# Altium PCB Piscina-V.02.PcbDoc
Units mil, origin at the board's own origin, x right, y up, seen from the top; angles counter-clockwise.
Board outline 18954 x 11289 mil, 2 copper layers (Top Layer, Bottom Layer); 161 components, 101 nets, 445 pads, 0 vias.
Unrouted connection lines stored in the file: 319.
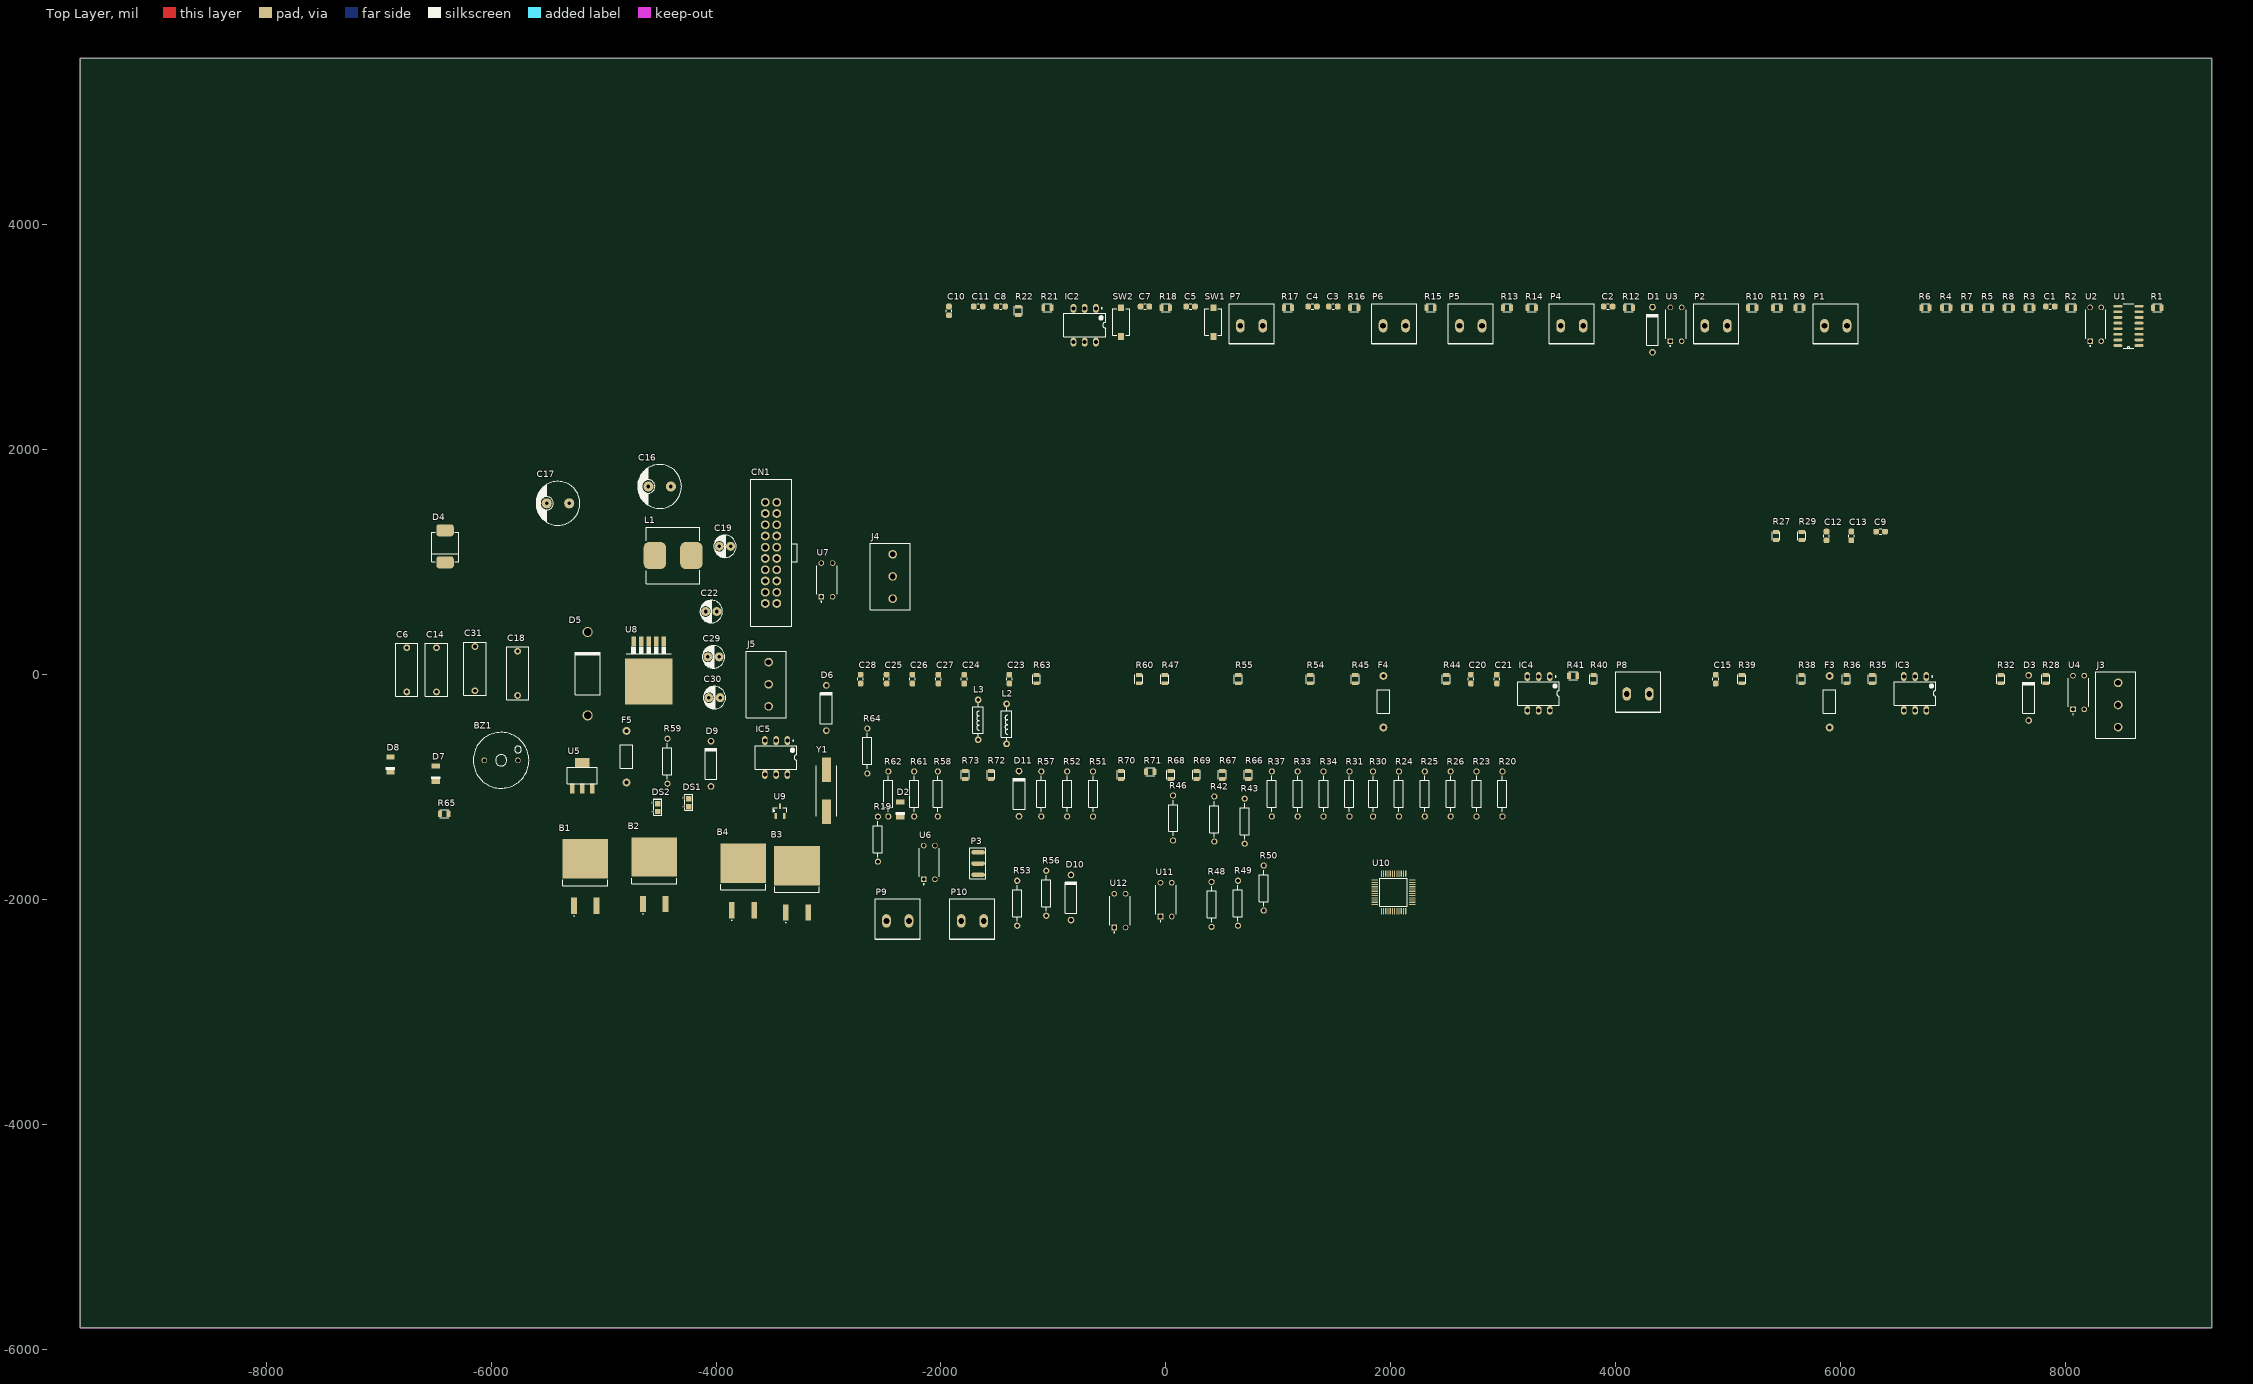
[diagram p0: Top Layer view]
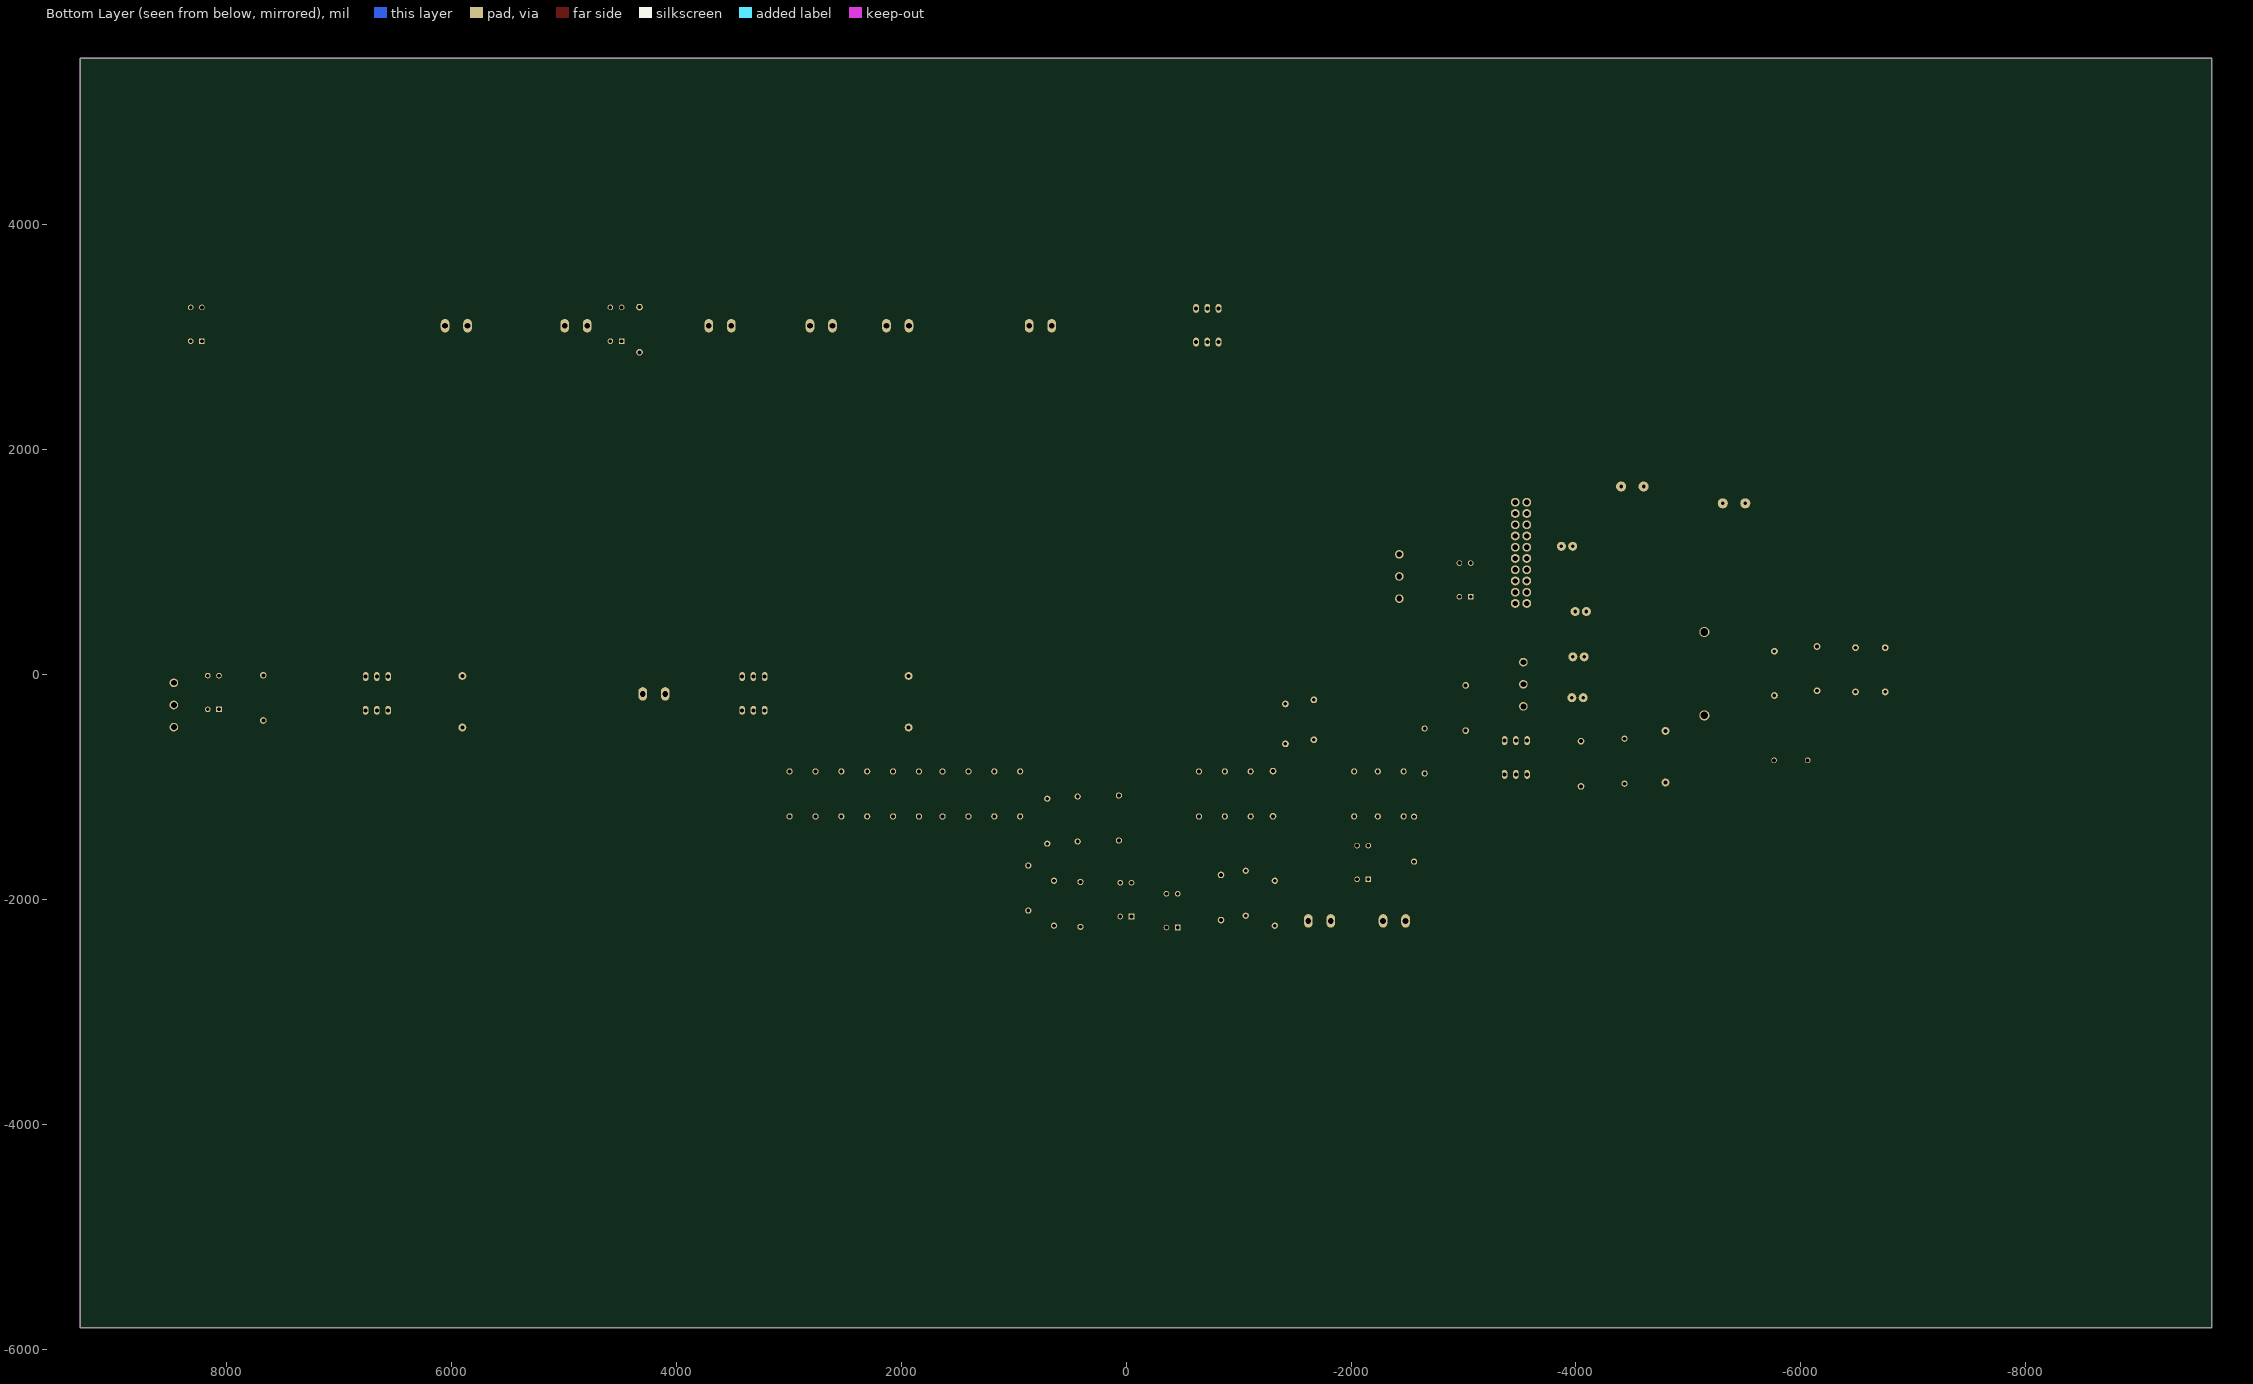
[diagram p1: Bottom Layer view, seen from below]

## Layer stack, top to bottom
Top Solder: solder mask 0.4, Solder Resist, Dk 3.5
Top Layer: signal copper 1.4
Dielectric 1: dielectric 12.6, FR-4, Dk 4.8
Bottom Layer: signal copper 1.4
Bottom Solder: solder mask 0.4, Solder Resist, Dk 3.5

## Board outline
-9654,-5806 -9654,5483 9300,5483 9300,-5806

## Design rules (kind name [scope] priority, off if disabled: settings)
Clearance [All] p1: gap=1 ignorepadtopadclearanceinfootprint=FALSE
PolygonConnect [All] p1: connectstyle=Relief reliefconductorwidth=10 reliefentries=4 polygonreliefangle="90 Angle" airgapwidth=10
RoutingVias [All] p1: holewidth=28 width=50 viastyle="Through Hole" minholewidth=28 minwidth=50 maxholewidth=28 maxwidth=50
SolderMaskExpansion [All] p1: expansion=4 istentingtop=FALSE
SupplyNets "Schematic Supply Nets_5" [InNet('GND')] p1: voltage=0.000
SupplyNets "Schematic Supply Nets_4" [InNet('Power-uC')] p2: voltage=0.000
SupplyNets "Schematic Supply Nets_3" [InNet('Pwr-uC-Gnd')] p3: voltage=0.000
SupplyNets "Schematic Supply Nets_2" [InNet('TensaoEntrada')] p4: voltage=0.000
SupplyNets "Schematic Supply Nets_1" [InNet('Power3v3')] p5: voltage=0.000
SupplyNets "Schematic Supply Nets" [InNet('Power5v0')] p6: voltage=0.000
Width [All] p1: maxlimit=10 minlimit=10 preferedwidth=10
30 further rules are at their usual default settings.

## Components (designator, comment, footprint, x,y, rotation, side; value= is the part's Value field where it differs from the comment)
B1 "T1050-8G" Triac-D²PAK -5164,-1845.64 r0 top
B2 "T1050-8G" Triac-D²PAK -4550,-1828.64 r0 top
B3 "T1050-8G" Triac-D²PAK -3280,-1904.64 r0 top
B4 "T1050-8G" Triac-D²PAK -3760,-1883.64 r0 top
BZ1 "Buzzer" Buzzer-3D -5911.39,-760 r0 top
C1 "100nF" Cap0805 7864,3275 r0 top
C2 "100nF" Cap0805 3932,3275 r0 top
C3 "1nF" Cap0805 1489,3275 r0 top
C4 "100nF" Cap0805 1304,3275 r0 top
C5 "100nF" Cap0805 219,3275 r0 top
C6 "Capacitor" CapX2-10mm -6750,45 r90 top
C7 "100nF" Cap0805 -186,3275 r0 top
C8 "10nF" Cap0805 -1469,3275 r0 top
C9 "1nF" Cap0805 6355,1274 r0 top
C10 "1nF" Cap0805 -1929,3236 r90 top
C11 "100nF" Cap0805 -1669,3275 r0 top
C12 "1nF" Cap0805 5874,1235 r90 top
C13 "100nF" Cap0805 6095,1235 r90 top
C14 "Capacitor" CapX2-10mm -6486,45 r90 top
C15 "1nF" Cap0805 4889,-38 r90 top
C16 "Capacitor Eletrolitico" Cap-Eletrolitico-5mm -4502,1675 r0 top
C17 "Capacitor Eletrolitico" Cap-Eletrolitico-5mm -5406,1525 r0 top
C18 "Capacitor" CapX2-10mm -5765,13 r90 top
C19 "Capacitor Eletrolitico" "Cap_47uf 16V" -3971,1143 r0 top
C20 "100nF" Cap0805 2712,-38 r90 top
C21 "100nF" Cap0805 2943,-38 r90 top
C22 "Capacitor Eletrolitico" "Cap_47uf 16V" -4093,563 r0 top
C23 "100nF" Cap0805 -1392,-38 r90 top
C24 "100nF" Cap0805 -1793,-38 r90 top
C25 "100nF" Cap0805 -2484,-38 r90 top
C26 "100nF" Cap0805 -2254,-38 r90 top
C27 "1nF" Cap0805 -2023,-38 r90 top
C28 "1nF" Cap0805 -2715,-38 r90 top
C29 "Capacitor Eletrolitico" "Cap_47uf 16V" -4073,160 r0 top
C30 "Capacitor Eletrolitico" "Cap_47uf 16V" -4064,-203 r0 top
C31 "Capacitor" CapX2-10mm -6144,55 r90 top
CN1 "JtagStm32" CN-JTAG -3511.18,1085 r90 top
D1 "Tranzorb" Diode-10mm-3D 4327,3069 r90 top
D2 "Zenner" Diode-SOD-80 -2361,-1197 r90 top
D3 "Tranzorb" Diode-10mm-3D 7672,-205 r90 top
D4 "Diode 10TQ035" MBR360 -6410,1285 r180 top
D5 "Diode 1N5408" Diode-1N5408 -5142,10.13 r90 top
D6 "Tranzorb" Diode-10mm-3D -3020,-295 r90 top
D7 "Zenner" Diode-SOD-80 -6491,-879 r90 top
D8 "Zenner" Diode-SOD-80 -6895,-798 r90 top
D9 "Tranzorb" Diode-10mm-3D -4045,-791 r90 top
D10 "Tranzorb" Diode-10mm-3D -844,-1980 r90 top
D11 "Tranzorb" Diode-10mm-3D -1306,-1057 r90 top
DS1 "RED LED" Led-smd -4242,-1138 r0 top
DS2 "RED LED" Led-smd -4518,-1181 r0 top
F3 "Fuse 1" PicoFuse 5902,-239 r90 top
F4 "Fuse 1" PicoFuse 1934,-239 r90 top
F5 "Fuse 1" PicoFuse -4796,-728 r90 top
IC2 "MOC3020" MOC3020-3D -722,3109 r0 top
IC3 "MOC3020" MOC3020-3D 6662,-165 r0 top
IC4 "MOC3020" MOC3020-3D 3314,-165 r0 top
IC5 "MOC3020" MOC3020-3D -3466,-735 r0 top
J3 "TB002-500-03OR" Borne-3V 8467,-268 r90 top
J4 "TB002-500-03OR" Borne-3V -2430,875 r90 top
J5 "TB002-500-03OR" Borne-3V -3533,-84 r90 top
L1 "33uH, 13.5A" "Indutor SMD" -4382,1061 r0 top
L2 "Inductor" Indutor_Ax -1417,-436 r90 top value=10uH
L3 "Inductor" Indutor_Ax -1670,-400 r90 top value=10uH
P1 "Conector KRE" Borne-2V 5956,3104 r0 top
P2 "Led1 Externo" Borne-2V 4892,3104 r0 top
P3 "Header 3" CN_UART -1670,-1678 r90 top
P4 "Conector KRE" Borne-2V 3610,3104 r0 top
P5 "Led2 Externo" Borne-2V 2711,3104 r0 top
P6 "Led3 Externo" Borne-2V 2031,3104 r0 top
P7 "Ordem de emergência" Borne-2V 762,3104 r0 top
P8 "Conector KRE" Borne-2V 4198,-170 r0 top
P9 "Conector KRE" Borne-2V -2385,-2188.08 r0 top
P10 "Conector KRE" Borne-2V -1720,-2188.08 r0 top
R1 "10K" RESC2012X65N 8816,3265 r0 top
R2 "2.2K" RESC2012X65N 8049,3265 r0 top
R3 "2.2K" RESC2012X65N 7679,3265 r0 top
R4 "10K" RESC2012X65N 6939,3265 r0 top
R5 "10K" RESC2012X65N 7309,3265 r0 top
R6 "10K" RESC2012X65N 6754,3265 r0 top
R7 "10K" RESC2012X65N 7124,3265 r0 top
R8 "2.2K" RESC2012X65N 7494,3265 r0 top
R9 "10K" RESC2012X65N 5634,3265 r0 top
R10 "2.2K" RESC2012X65N 5214,3265 r0 top
R11 "2.2K" RESC2012X65N 5434,3265 r0 top
R12 "2.2K" RESC2012X65N 4117,3265 r0 top
R13 "40.2K" RESC2012X65N 3033,3265 r0 top
R14 "10K" RESC2012X65N 3253,3265 r0 top
R15 "40.2K" RESC2012X65N 2354,3265 r0 top
R16 "40.2K" RESC2012X65N 1674,3265 r0 top
R17 "40.2K" RESC2012X65N 1085,3265 r0 top
R18 "40.2K" RESC2012X65N -1,3265 r0 top
R19 "Res2" "Resistor 1-4W" -2561,-1461 r90 top value=1K
R20 "Res2" "Resistor 1-4W" 2992,-1059 r90 top value=1K
R21 "40.2K" RESC2012X65N -1054,3265 r0 top
R22 "40.2K" RESC2012X65N -1313,3236 r90 top
R23 "Res2" "Resistor 1-4W" 2762,-1059 r90 top value=1K
R24 "Res2" "Resistor 1-4W" 2072,-1059 r90 top value=1K
R25 "Res2" "Resistor 1-4W" 2302,-1059 r90 top value=1K
R26 "Res2" "Resistor 1-4W" 2532,-1059 r90 top value=1K
R27 "10K" RESC2012X65N 5425,1235 r90 top
R28 "?" RESC2012X65N 7823,-38 r90 top
R29 "40.2K" RESC2012X65N 5655,1235 r90 top
R30 "Res2" "Resistor 1-4W" 1842,-1059 r90 top value=1K
R31 "Res2" "Resistor 1-4W" 1632,-1059 r90 top value=1K
R32 "40.2K" RESC2012X65N 7423,-38 r90 top
R33 "Res2" "Resistor 1-4W" 1172,-1059 r90 top value=1K
R34 "Res2" "Resistor 1-4W" 1402,-1059 r90 top value=1K
R35 "40.2K" RESC2012X65N 6281,-38 r90 top
R36 "40.2K" RESC2012X65N 6051,-38 r90 top
R37 "Res2" "Resistor 1-4W" 942,-1059 r90 top value=1K
R38 "40.2K" RESC2012X65N 5651,-38 r90 top
R39 "40.2K" RESC2012X65N 5120,-38 r90 top
R40 "40.2K" RESC2012X65N 3802,-38 r90 top
R41 "40.2K" RESC2012X65N 3621,-9 r0 top
R42 "Res2" "Resistor 1-4W" 430,-1282 r90 top value=1K
R43 "Res2" "Resistor 1-4W" 701,-1301 r90 top value=1K
R44 "40.2K" RESC2012X65N 2493,-38 r90 top
R45 "40.2K" RESC2012X65N 1683,-38 r90 top
R46 "Res2" "Resistor 1-4W" 64,-1273 r90 top value=1K
R47 "10K" RESC2012X65N -10,-38 r90 top
R48 "Res2" "Resistor 1-4W" 406,-2041 r90 top value=1K
R49 "Res2" "Resistor 1-4W" 641,-2031 r90 top value=1K
R50 "Res2" "Resistor 1-4W" 870,-1896 r90 top value=1K
R51 "Res2" "Resistor 1-4W" -648,-1059 r90 top value=1K
R52 "Res2" "Resistor 1-4W" -878,-1059 r90 top value=1K
R53 "Res2" "Resistor 1-4W" -1322,-2031 r90 top value=1K
R54 "10K" RESC2012X65N 1283,-38 r90 top
R55 "?" RESC2012X65N 643,-38 r90 top
R56 "Res2" "Resistor 1-4W" -1064,-1942 r90 top value=1K
R57 "Res2" "Resistor 1-4W" -1108,-1059 r90 top value=1K
R58 "Res2" "Resistor 1-4W" -2028,-1059 r90 top value=1K
R59 "Res2" "Resistor 1-4W" -4432,-768 r90 top value=1K
R60 "40.2K" RESC2012X65N -240,-38 r90 top
R61 "Res2" "Resistor 1-4W" -2238,-1059 r90 top value=1K
R62 "Res2" "Resistor 1-4W" -2468,-1059 r90 top value=1K
R63 "40.2K" RESC2012X65N -1151,-38 r90 top
R64 "Res2" "Resistor 1-4W" -2655,-677 r90 top value=1K
R65 "2.2K" RESC2012X65N -6417,-1236 r0 top
R66 "10K" RESC2012X65N 732,-890 r90 top
R67 "10K" RESC2012X65N 502,-890 r90 top
R68 "2.2K" RESC2012X65N 42,-890 r90 top
R69 "2.2K" RESC2012X65N 272,-890 r90 top
R70 "2.2K" RESC2012X65N -399,-890 r90 top
R71 "2.2K" RESC2012X65N -140,-861 r0 top
R72 "2.2K" RESC2012X65N -1555,-890 r90 top
R73 "2.2K" RESC2012X65N -1785,-890 r90 top
SW1 "434121025816" 434121025816 422,3137 r90 top
SW2 "434121025816" 434121025816 -398,3137 r90 top
U1 "ULN2003ADR" ULN2003A-3D 8559,3103 r90 top
U2 "PC817X3NSZ1B" DIP762W50P254L495H455Q4 8268,3117 r90 top
U3 "PC817X3NSZ1B" DIP762W50P254L495H455Q4 4536,3117 r90 top
U4 "PC817X3NSZ1B" DIP762W50P254L495H455Q4 8116,-157 r90 top
U5 "lm1117" LM1117-3D -5190,-896 r0 top
U6 "PC817X3NSZ1B" DIP762W50P254L495H455Q4 -2104,-1668 r90 top
U7 "PC817X3NSZ1B" DIP762W50P254L495H455Q4 -3014,844 r90 top
U8 "LM2576HVS-5.0/NOPB" LM2576 -4599,121 r90 top
U9 "MCP100T-270I/TT" MCP100-SMD -3432,-1212 r0 top
U10 "STM32F103C6T6" lqfp48-stm 2024,-1934 r0 top
U11 "PC817X3NSZ1B" DIP762W50P254L495H455Q4 2,-1999 r90 top
U12 "PC817X3NSZ1B" DIP762W50P254L495H455Q4 -409,-2097 r90 top
Y1 "ABLS-12.000MHz-20-B-3-H-T" XTAL_ABLS-12.000MHz-20-B-3-H-T -3018,-1031 r90 top

## Footprints (in the part's own frame and the unit in brackets; to place one, negate y for a bottom-side part, rotate by r counter-clockwise, add the part's x,y. Pads: shape width x height; smd on the part's side, far side on the other; paste and mask are expansions set on the pad)
434121025816 [mm] "SMD Tact Switch, body 6x3.8mm"
  rect 1.5x1.4 smd: 1(-3.25,0) 2(3.25,0)
  silkscreen extent -3,-1.95 3,1.95, body extent -3.65,-1.95 3.65,1.95, height 2.5
Borne-2V [mm] "Borne de 2 vias parafuso 9mm"
  oval 1.95x3.048 hole 1.3: 1(-2.54,0) 2(2.54,0)
  silkscreen extent -5.08,-4.1 5.08,5, body extent -5.2,-3.56 5.2,4.24, height 10.4
Borne-3V [mm] "Borne parafuso de 3 vias 9mm"
  round 1.95 hole 1.3: 1(-5,0) 2(0,0) 3(5,0)
  silkscreen extent -7.54,-4 7.5,5, body extent -7.95,-3.48 7.45,4.32, height 10.33
Buzzer-3D [mil] "Buzzer com 3D"
  round 50 hole 36: NEG(-149.61,0) POS(149.61,0)
  silkscreen extent -248,-248 248,248, body extent -226,-231 246,241, height 340
Cap0805 [mm] "Capacitor smd sem o silk ao redor dos pads"
  rrect50% 1.27x1.27 smd mask+0.076: 1(-1,0) 2(1,0)
  silkscreen extent -0.25,-0.64 0.25,0.64, body extent -1,-0.65 1,0.6
Cap-Eletrolitico-5mm [mil] "Capacitor eletrolitico 5mm de pino a pino"
  round 90 hole 32: Negativo(-100,0) Positivo(100,0)
  silkscreen extent -195,-195 195,195, body extent -198,-196 196,196, height 591
"Cap_47uf 16V" [mil]
  round 80 hole 32: Negativo(0,0) Positivo(100,0)
  silkscreen extent -50,-100 150,100, body extent -48,-100 148,96, height 476
CapX2-10mm [mil] "Capacitor X2 de 10mm"
  round 60 hole 32: 1(-196.85,0) 2(196.85,0)
  silkscreen extent -236,-98 236,98, body extent -256,-97 256,100, height 437
CN-JTAG [mm] "Conector do Jtag 20 Pinos"
  round 2 hole 1.2: 1(-11.43,-1.3) 2(-11.43,1.3) 3(-8.89,-1.3) 4(-8.89,1.3) 5(-6.35,-1.3) 6(-6.35,1.3) 7(-3.81,-1.3) 8(-3.81,1.3) 9(-1.27,-1.3) 10(-1.27,1.3) 11(1.27,-1.3) 12(1.27,1.3) 13(3.81,-1.3) 14(3.81,1.3) 15(6.35,-1.3) 16(6.35,1.3) 17(8.89,-1.3) 18(8.89,1.3) 19(11.43,-1.3) 20(11.43,1.3)
  silkscreen extent -16.64,-5.94 16.64,4.6, body extent -16.47,-4.6 16.53,4.5, height 9
CN_UART [mm] "Conector para UART"
  oval 1x3.1 smd: 1(-2.54,0) 2(0,0) 3(2.54,0)
  silkscreen extent -3.43,-1.78 3.56,1.91
Diode-1N5408 [mil] "Diodo grande com 3D"
  round 90 hole 66.93: 1(-370.87,0) 2(370.87,0)
  silkscreen extent -189,-110 193,110, body extent -401,-178 401,180, height 437
Diode-10mm-3D [mm] "Diodo 10mm com 3D"
  round 1.5 hole 0.9: 1(-5.1,0) 2(5.1,0)
  silkscreen extent -3.5,-1.35 3.6,1.35, body extent -5.51,-1.27 5.51,1.44, height 3.2
Diode-SOD-80 [mil] "Diodo sod-80 smd"
  rect 45x75 smd: A(67.5,0) C(-67.5,0)
  silkscreen extent -45,-40 -25,40, body extent -74,-31 72,32, height 63
DIP762W50P254L495H455Q4 [mm]
  rect 1.26x1.26 / inner round 1.26 / far side rect 1.26x1.26 hole 0.84: 1(-3.81,1.27)
  round 1.26 hole 0.84: 2(-3.81,-1.27) 3(3.81,-1.27) 4(3.81,1.27)
  silkscreen extent -5.01,-2.3 3.25,2.3, body extent -3.94,-2.3 3.94,2.3, height 4.55
"Indutor SMD" [mil]
  rrect50% 200x240 smd: 1(-162.5,0) 2(162.5,0)
  silkscreen extent -238,-253 238,250, body extent -236,-240 237,232, height 354
Indutor_Ax [mil] "Indutor Axial cores"
  round 60 hole 32: 1(-177.5,0) 2(177.5,0)
  silkscreen extent -148,-47 148,47, body extent -182,-53 177,53, height 118
Led-smd [mm] "Led smd com 3D"
  rect 1.2x1.2 smd mask+0.076: A(0,-0.889) K(0,0.889)
  silkscreen extent -0.89,-1.73 0.89,1.99, body extent -0.62,-1.01 0.63,1.01, height 1.1
LM1117-3D [mm] "Regulador de 3.3V"
  rect 1x2.2 smd: 0(2.3,-2.9) 1(-2.3,-2.9) 2(0,-2.9)
  rect 3.3x2.2 smd: 2(0,2.9)
  silkscreen extent -3.35,-1.85 3.35,1.85, body extent -3.25,-3.25 3.25,3.75, height 1.61
LM2576 [mil] "CI LM2576 smd com 3D"
  rect 85x42 smd: 1(179,-134) 2(179,-67) 3(179,0) 4(179,67) 5(179,134)
  rect 409.84x425.2 smd: 6(-179,0)
  silkscreen extent 61,-201 127,201, body extent -362,-193 212,193, height 166
lqfp48-stm [mm] "lqfp48-stm SMD"
  oval 1.475x0.254 smd: 1(-4.238,2.75) 2(-4.238,2.25) 3(-4.238,1.75) 4(-4.238,1.25) 5(-4.238,0.75) 6(-4.238,0.25) 7(-4.238,-0.25) 8(-4.238,-0.75) 9(-4.238,-1.25) 10(-4.238,-1.75) 11(-4.238,-2.25) 12(-4.238,-2.75) 25(4.238,-2.75) 26(4.238,-2.25) 27(4.238,-1.75) 28(4.238,-1.25) 29(4.238,-0.75) 30(4.238,-0.25) 31(4.238,0.25) 32(4.238,0.75) 33(4.238,1.25) 34(4.238,1.75) 35(4.238,2.25) 36(4.238,2.75)
  oval 0.254x1.475 smd: 13(-2.75,-4.238) 14(-2.25,-4.238) 15(-1.75,-4.238) 16(-1.25,-4.238) 17(-0.75,-4.238) 18(-0.25,-4.238) 19(0.25,-4.238) 20(0.75,-4.238) 21(1.25,-4.238) 22(1.75,-4.238) 23(2.25,-4.238) 24(2.75,-4.238) 37(2.75,4.238) 38(2.25,4.238) 39(1.75,4.238) 40(1.25,4.238) 41(0.75,4.238) 42(0.25,4.238) 43(-0.25,4.238) 44(-0.75,4.238) 45(-1.25,4.238) 46(-1.75,4.238) 47(-2.25,4.238) 48(-2.75,4.238)
  silkscreen extent -3.15,-3.15 3.15,3.15, body extent -4.5,-4.5 4.5,4.5, height 1.6
MBR360 [mil] "Diodo Schottky"
  rrect50% 156x108 smd: Anodo(0,0) Catodo(0,285)
  silkscreen extent -120,15 120,280, body extent -114,-15 118,298, height 91
MCP100-SMD [mil] "MCP100-SMD"
  rect 22x52 smd: 1(-37,-43) 2(37,-43)
  rect 20x52 smd: 3(0,43)
  silkscreen extent -60,-11 60,28, body extent -57,-52 57,42, height 44
MOC3020-3D [mil] "Acoplador MOC com 3D"
  oval 50x80 hole 35.43: 1(100,150) 2(0,150) 3(-100,150) 4(-100,-150) 5(0,-150) 6(100,-150)
  silkscreen extent -185,-104 185,155, body extent -140,-173 140,173, height 189
PicoFuse [mil] "Micro fusivel axial"
  round 70 hole 35.43: 1(229.33,0) 2(-229.33,0)
  silkscreen extent -104,-55 104,55, body extent -241,-55 241,55, height 110
RESC2012X65N [mm]
  rrect25% 0.889x1.42 smd: 1(-0.935,0) 2(0.935,0)
  silkscreen extent -1,-0.89 1,0.89, body extent -1,-0.61 1,0.64, height 0.55
"Resistor 1-4W" [mm] "Resistor de 1-4W"
  round 1.4 hole 0.85: 1(5.08,0) 2(-5.08,0)
  silkscreen extent -4.06,-1.02 4.06,1.02, body extent -5.33,-1.27 5.33,1.13, height 2.47
Triac-D²PAK [mm] "Invólucro D²PAK"
  rect 1.3x3.7 smd: 1(-2.54,-5.299) 3(2.54,-5.299)
  rect 10.3x8.9 smd: 2(0,5.299)
  silkscreen extent -5.07,-7.64 5.07,0.56, body extent -5.14,-6.44 4.88,9.3, height 4.45
ULN2003A-3D [mil] "CI ULN2003 com 3D"
  oval 24x81 smd: 1(-175,-94.5) 2(-125,-94.5) 3(-75,-94.5) 4(-25,-94.5) 5(25,-94.5) 6(75,-94.5) 7(125,-94.5) 8(175,-94.5) 9(175,94.5) 10(125,94.5) 11(75,94.5) 12(25,94.5) 13(-25,94.5) 14(-75,94.5) 15(-125,94.5) 16(-175,94.5)
  silkscreen extent -197,-46 197,46, body extent -195,-118 195,118, height 69
XTAL_ABLS-12.000MHz-20-B-3-H-T [mm]
  rect 5.6x2.1 smd: 1(-4.75,0) 2(4.75,0)
  silkscreen extent -5.7,-2.35 5.7,2.35, body extent -6.35,-2.35 6.35,2.35, height 4.06

## Part data
B1 B2 B3 B4: "800V, 10A Snubberless? Triac in D2PAK", Manufacturer_Name=STMicroelectronics, Arrow Part Number=T1050-8G, Arrow Price/Stock=https://www.arrow.com/en/products/t1050-8g/stmicroelectronics, Datasheet Link=https://www.st.com/resource/en/datasheet/btb10.pdf, Geometry.Height=4.83mm, Manufacturer_Part_Number=T1050-8G
BZ1: library part WST-1205S, "Buzzer 2.3khz 4-6vdc Pcb Wash", Package="Soberton Inc.", Availability=Unavailable, MF="Soberton Inc.", MP=WST-1205S, Price=None, SnapEDA_Link=https://www.snapeda.com/parts/WST-1205S/Soberton%20Inc./view-part/?ref=snap
C1 C2 C3 C4 C5 C7 C8 C9 C10 C11 C12 C13 C15 C21 C23 C25 C26 C27 C28: library part CAP_100nF-25V-10%-0805, "0.1µF ±10% 25V Ceramic Capacitor X7R 0805 (2012 Metric)", Case/Package=0805, Manufacturer=Yageo, Manufacturer Part Number=CC0805KRX7R8BB104, Supplier-1=Digikey
C6 C14 C18 C31: library part Cap-10mm, Package=None, Availability=Unavailable, MP=ECQE6153KF, Price=None
C16 C17 C19 C22 C29 C30: library part "Cap_47uf 16V"
C20 C24: library part CAP_10uF-25V-10%-0805, "10µF ±10% 25V Ceramic Capacitor X5R 0805 (2012 Metric)", Case/Package=0805, Manufacturer="Murata Electronics", Manufacturer Part Number=GRM21BR61E106KA73K, Supplier-1=Digikey
D1 D3 D6 D9 D10 D11: "Transient Voltage Suppression (TVS) Diode", LatestRevisionDate=17-Jul-2002, LatestRevisionNote="Re-released for DXP Platform.", PackageDescription="Axial Lead Diode", PackageReference=DO-7, Published=24-Mar-1999, Publisher="Altium Limited"
D2 D7 D8: library part DL4148-TP, "Diode Standard 75V 150mA Surface Mount Mini MELF", Package="DO-213 MCC", Availability=Unavailable, MF="Micro Commercial", MP=DL4148-TP, Price=None, SnapEDA_Link=https://www.snapeda.com/parts/DL4148-TP/Micro%20Commercial/view-part/231264/?ref=snap
D4: "Schottky Rectifier", ComponentLink1Description="Manufacturer Link", ComponentLink1URL=http://www.irf.com/, ComponentLink2Description=Datasheet, ComponentLink2URL=http://www.irf.com/product-info/datasheets/data/10tq.pdf, DatasheetVersion=PD-2.057B, LatestRevisionDate=17-Jul-2002, LatestRevisionNote="Re-released for DXP Platform.", Note="Terminal 2 is the TAB and is electrically connected to the cathode", PackageDescription="TO, Thru-Hole, Vertical, Heatsink Mounted; 3 In-Line Leads (1 Absent); Pitch 2.54 mm", PackageReference=TO-220AC, PackageVersion=Feb-1998, Published=8-Jun-2000, Publisher="Altium Limited"
D5: "3 Amp Medium Power Silicon Rectifier Diode", ComponentLink1Description="Manufacturer Link", ComponentLink1URL=http://www.irf.com/, DatasheetVersion=Aug-1984, LatestRevisionDate=17-Jul-2002, LatestRevisionNote="Re-released for DXP Platform.", PackageDescription="Diode, Axial; Body 9.5 x 5.3 mm (LxDia. max), Lead Dia. 1.32 mm (max)", PackageReference=DO-201AD, Published=8-Jun-2000, Publisher="Altium Limited"
DS1 DS2: library part LED_RED-2V-20mA-0805, "Red 631nm LED Indication - Discrete 2V 0805 (2012 Metric)", Case/Package=0805, Manufacturer="Vishay Lite-On", Manufacturer Part Number=LTST-C171KRKT, Supplier-1="SP ROAD"
F3 F4 F5: "Fuse", LatestRevisionDate=17-Jul-2002, LatestRevisionNote="Re-released for DXP Platform.", PackageDescription="Thru-Hole; 2 Leads", PackageReference=PIN-W2/E2.8, Published=8-Jun-2000, Publisher="Altium Limited"
IC2 IC3 IC4 IC5: "Optoisolator Triac Output 5300Vrms 1 Channel 6-DIP", Package="DIP-6 ON Semiconductor", Availability=Unavailable, MF="ON Semiconductor", MP=MOC3020, Price=None, SnapEDA_Link=https://www.snapeda.com/parts/MOC3020/ON%20Semiconductor/view-part/2780094/?ref=snap
J3 J4 J5: "2~24 Poles, Screw Type, Horizontal, 5.0 Pitch, 22~12 _AWG_, Terminal Block Connector", Package=None, Availability=Unavailable, CUI_purchase_URL=https://www.cui.com/product/interconnect/connectors/terminal-blocks/tb002-500-series?utm_source=snapeda.com&utm_medium=referral&utm_campaign=snapedaBOM, MF=CUI, MP=TB002-500-03OR, Price=None, SnapEDA_Link=https://www.snapeda.com/parts/TB002-500-03OR/CUI/view-part/?ref=snap
L1: library part 74477001, "WE-PD SMT Power Inductor, size 1280, 1.2uH, 13.5A, 7mOhm", Case/Size Code=1280, DC Resistance=4.6mOhm, DC Resistance Max=7mOhm, Inductance=1.2uH, Manufacturer="Wurth Elektronik", Operating Temperature Max=125°C, Operating Temperature Min=-40°C, Rated Current=13.5A, Saturation Current=21A, Self Resonant Frequency=45MHz, Category="Power Inductors", ComponentLink1Description="Website Link", ComponentLink1URL=https://www.we-online.com/redexpert/article/74477001?ad, ComponentLink2Description="Datasheet Link", ComponentLink2URL=https://www.we-online.com/redexpert/spec/74477001?ad, Height=8mm, Length=12mm, Manufacturer Part Number=74477001, Match Code=WE-PD, Mount="Surface Mount", Packaging="Tape and Reel", Type=Standard, Width=12mm
P2 P5 P6 P7: library part "Conector KRE"
P3: "Header, 3-Pin", LatestRevisionDate=17-Jul-2002, LatestRevisionNote="Re-released for DXP Platform.", Publisher="Altium Limited"
R1 R2 R3 R4 R5 R6 R7 R8 R9 R10 R11 R12 R13 R14 R15 R16 R17 R18 R21 R22 R27 R28 R29 R32 R35 R36 R38 R39 R40 R41 R44 R45 R47 R54 R55 R60 R63 R65 R66 R67 R68 R69 R70 R71 R72 R73: library part RES_40.2K-0.125W-1%-0805, "40.2 kOhms ±1% 0.125W, 1/8W Chip Resistor 0805 (2012 Metric) Automotive AEC-Q200 Thick Film", Alternate Part Number-1=NA, Case/Package=0805, Manufacturer="TE Connectivity", Manufacturer Part Number=RMCF0805FT40K2, Supplier Part Number-1=WR08X4022FTL, Category=Resistor, Number of Pins=2, Supplier-1=SIRICOM
R19 R20 R23 R24 R25 R26 R30 R31 R33 R34 R37 R42 R43 R46 R48 R49 R50 R51 R52 R53 R56 R57 R58 R59 R61 R62 R64: "Resistor", LatestRevisionDate=17-Jul-2002, LatestRevisionNote="Re-released for DXP Platform.", PackageDescription="Axial Device, Thru-Hole; 2 Leads; 0.4 in Pin Spacing", PackageReference=AXIAL-0.4, Published=8-Jun-2000, Publisher="Altium Limited"
SW1 SW2: "WS-TASV SMT Tact Switch, 6mm x 3.8mm, 160gf, SPST-NO, 12V, 50mA", Manufacturer="Wurth Elektronik", Max Operating Temperature=85°C, Min Operating Temperature=-40°C, Rated Current=50mA, Rated Voltage (DC)=12V, Category="Tact Switch", Circuit=SPST-NO, ComponentLink1Description="Website Link", ComponentLink1URL=https://www.we-online.com/redexpert/article/434121025816?ad, ComponentLink2Description="Datasheet Link", ComponentLink2URL=https://www.we-online.com/redexpert/spec/434121025816?ad, Contact Material="Stainless Steel", Contact Plating=Silver, Height=2.5mm, Length=6mm, Manufacturer Part Number=434121025816, Match Code=WS-TASV, Mount="Surface Mount", Operation Force=160gf, Packaging="Tape and Reel", Terminal Material="Copper Alloy", Terminal Plating=Silver, Washable=No, Width=3.8mm
U1: "PARTCOUNT=2", Package="SOIC-16 STMicroelectronics", Availability=Unavailable, MF="Texas Instruments", MP=ULN2003ADR, Price=None, SnapEDA_Link=https://www.snapeda.com/parts/ULN2003ADR/Texas%20Instruments/view-part/?ref=snap
U2 U3 U4 U6 U7 U11 U12: "Optoisolator Transistor Output - 1 Channel 4-DIP", Package="DIP-4 Sharp Microelectronics", Availability="In Stock", Check_prices=https://www.snapeda.com/parts/PC817X3NSZ1B/Sharp+Microelectronics/view-part/?ref=eda, MF="Sharp Microelectronics", MP=PC817X3NSZ1B, Price=None, Purchase-URL=https://pricing.snapeda.com/search/part/PC817X3NSZ1B/?ref=eda, SnapEDA_Link=https://www.snapeda.com/parts/PC817X3NSZ1B/Sharp+Microelectronics/view-part/?ref=snap
U5: "The LM1117 is a low dropout voltage regulator with a / dropout of 1.2 V at 800 mA of load current. / The LM1117 is available in an adjustable version, / which can set the output voltage from 1.25 to 13.8 V / with only two external resistors. In addition, it is / available in five fixed voltages, 1.8 V, 2.5 V, 3.3 V, / and 5 V. / The LM1117 offers current limiting and thermal / shutdown. Its circuit includes a Zener trimmed / bandgap reference to assure output voltage accuracy / to within ±1%. / A minimum of 10-µF tantalum capacitor is required at / the output to improve the transient response and / stability.", output voltag=3.3V, ComponentLink1Description=datasheet, ComponentLink1URL=https://www.ti.com/lit/gpn/lm1117
U8: "SIMPLE SWITCHER%3F 40V%2C 3A Low Component Count Step-Down Regulator 5-DDPAK/TO-263 -40 to 125", Package="TO-263-5 Texas Instruments", Availability=Good, MF="Texas Instruments", MP=LM2576SX-ADJ/NOPB, Price="1.87 USD"
U9: "Supervisor Push-Pull, Ð¢Ð¾Ñ‚ÐµÐ¼Ð½Ñ‹Ð¹ ÑÑ‚Ð¾Ð»Ð±, 1 ÐºÐ°Ð½Ð°Ð», SOT-23-3", Package="SOT-23-3 Microchip", Availability=Unavailable, MF=Microchip, MP=MCP100T-270I/TT, Price=None, SnapEDA_Link=https://www.snapeda.com/parts/MCP100T-270I/TT/Microchip/view-part/457931/?ref=snap
U10: "STM32 ARM-based 32-bit MCU with 32 Kbytes Flash, 48-pin LQFP, Industrial Temperature", ComponentLink1Description="Manufacturer Link", ComponentLink1URL=www.st.com/stm32, ComponentLink2Description=Datasheet, ComponentLink2URL=http://www.st.com/stonline/products/literature/ds/13587.pdf, DatasheetVersion="rev6, Mar-2008", PackageDescription="48-Pin Low-Profile Quad Flat Pack, 7 x 7 mm Body, 0.5 mm Pitch (LQFP48)", PackageReference=LQFP48, PackageVersion=Mar-2008, Published=30-May-2008, Publisher="Altium Limited"
Y1: "HC/49US (AT49) SMD LOW PROFILE CRYSTAL", Package=None, Check_prices=https://www.snapeda.com/parts/ABLS-12.000MHZ-20-B-3-H-T/Abracon+LLC/view-part/?ref=eda, Digi-Key_Part_Number=535-15006-2-ND, MF="Abracon LLC", MP=ABLS-12.000MHZ-20-B-3-H-T, Purchase-URL=https://pricing.snapeda.com/search/part/ABLS-12.000MHZ-20-B-3-H-T/?ref=eda, SnapEDA_Link=https://www.snapeda.com/parts/ABLS-12.000MHZ-20-B-3-H-T/Abracon+LLC/view-part/?ref=snap
L2 L3: Code_IEC=1005, Code_JEITA=0402, LatestRevisionDate=29-May-2009, LatestRevisionNote="IPC-7351 Footprint Added.", PackageDescription="Chip Inductor", PackageReference=0402-A, Published=8-Jun-2000, Publisher="Altium Limited"

## Nets (pads, with @x,y where several pads share a name; then routed paths per layer and width w, separated by ;. In a path a pad name is that pad's centre, name@x,y a point inside that pad or via, vN(x,y) a via of type N, cw(c..) or ccw(c..) an arc to the next point about the centre after c; other vN are vias at no path point)
GND: C2.1 C16.Negativo C17.Negativo C19.Negativo C20.1 C21.1 C22.Negativo C24.1 C25.1 C26.1 C27.1 CN1.4 CN1.6 CN1.8 CN1.10 CN1.12 CN1.14 CN1.16 CN1.18 CN1.20 D1.1 D4.Anodo D5.1 D10.1 D11.1 DS1.K DS2.K L3.1 P3.3 P8.1 R2.1 R12.1 R13.2 R14.2 R40.1 R41.1 R72.1 R73.1 SW2.1 U1.8 U2.2 U2.3 U3.2 U3.3 U4.3 U5.1 U6.3 U7.3 U8.5 U8.6 U11.2 U11.3 U12.2 U12.3
NetB1_1: B1.1 C6.1 J3.1 R23.2 R26.2
NetB1_2: B1.2 B4.1 C31.1 F5.2 R20.2 R64.1
NetB1_3: B1.3 IC2.4 R23.1
NetB2_1: B2.1 B3.2 C14.1 F4.2 R37.1 R43.1
NetB2_2: B2.2 J3.3 R31.1 R34.1
NetB2_3: B2.3 IC3.4 R37.2
NetB3_1: B3.1 C18.1 J5.1 R46.2 R50.1
NetB3_3: B3.3 IC4.4 R46.1
NetB4_2: B4.2 J5.3 R52.1 R59.1 R62.2
NetB4_3: B4.3 IC5.4 R64.2
NetBZ1_NEG: BZ1.NEG U1.16
NetC5_1: C5.1 U10.5 Y1.1
NetC6_2: C6.2 R19.2 R20.1
NetC7_1: C7.1 U10.6 Y1.2
NetC14_2: C14.2 R33.1 R34.2
NetC15_1: C15.1 R39.1 R41.2 U8.4
NetC16_Positivo: C16.Positivo D5.2 F3.2
NetC18_2: C18.2 R42.1 R43.2
NetC31_2: C31.2 R58.1 R59.2
NetCN1_3: CN1.3 R4.2 U10.40
NetCN1_5: CN1.5 R5.2 U10.38
NetCN1_7: CN1.7 R6.2 U10.34
NetCN1_9: CN1.9 R13.1 U10.37
NetCN1_11: CN1.11 R14.1
NetCN1_13: CN1.13 R7.2 U10.39
NetCN1_15: CN1.15 R15.1
NetCN1_19: CN1.19 R16.1
NetD1_2: D1.2 R10.2 R11.1
NetD2_A: D2.A D3.1 R28.1 R30.1 R31.2 U4.2
NetD2_C: D2.C D3.2 R24.2 R25.1 R28.2
NetD4_Catodo: D4.Catodo L1.1 U8.2
NetD6_1: D6.1 D7.A R61.2 R62.1 U7.2
NetD6_2: D6.2 D7.C R56.1 R57.2
NetD8_A: D8.A D9.1 R51.1 R52.2 R55.1 U6.2
NetD8_C: D8.C D9.2 R48.2 R49.2 R55.2
NetD10_2: D10.2 R68.2 R69.1
NetD11_2: D11.2 R70.2 R71.1
NetDS1_A: DS1.A R29.1
NetDS2_A: DS2.A R36.1
NetF3_1: F3.1 P8.2
NetF4_1: F4.1 J4.1
NetF5_1: F5.1 J4.3
NetIC2_1: IC2.1 R21.1 R22.2
NetIC2_2: IC2.2 R22.1 U1.10
NetIC2_6: IC2.6 R19.1
NetIC3_1: IC3.1 R32.1 R35.2
NetIC3_2: IC3.2 R35.1 U1.13
NetIC3_6: IC3.6 R33.2
NetIC4_1: IC4.1 R44.1 R45.2
NetIC4_2: IC4.2 R45.1
NetIC4_6: IC4.6 R42.2
NetIC5_1: IC5.1 R60.1 R63.2
NetIC5_2: IC5.2 R63.1
NetIC5_6: IC5.6 R58.2
NetP1_2: P1.2 R8.1
NetP2_2: P2.2 U1.11
NetP3_1: P3.1 U10.31
NetP3_2: P3.2 U10.30
NetP4_1: P4.1 R10.1
NetP5_2: P5.2 U1.12
NetP6_2: P6.2 U1.14
NetP7_2: P7.2 U1.15
NetP9_1: P9.1 R68.1
NetP10_1: P10.1 R70.1
NetR1_2: R1.2 U2.4 U10.12
NetR2_2: R2.2 R8.2 U2.1
NetR3_1: R3.1 R15.2 U9.1 U10.7
NetR9_1: R9.1 U3.4 U10.25
NetR11_2: R11.2 R12.2 U3.1
NetR17_1: R17.1 SW1.1 U10.44
NetR18_1: R18.1 SW2.2 U10.26
NetR24_1: R24.1 R30.2 U4.1
NetR25_2: R25.2 R26.1
NetR27_1: R27.1 U4.4 U10.28
NetR29_2: R29.2 U10.11
NetR38_1: R38.1 R40.2 U10.10
NetR47_1: R47.1 U7.4 U10.13
NetR48_1: R48.1 R51.2 U6.1
NetR49_1: R49.1 R50.2
NetR53_1: R53.1 R56.2
NetR54_1: R54.1 U6.4 U10.27
NetR57_1: R57.1 R61.1 U7.1
NetR65_1: R65.1 U10.20
NetR66_1: R66.1 U10.46 U11.4
NetR67_1: R67.1 U10.22 U12.4
NetR69_2: R69.2 R72.2 U11.1
NetR71_2: R71.2 R73.2 U12.1
NetU1_1: U1.1 U10.19
NetU1_2: U1.2 U10.21
NetU1_3: U1.3 U10.18
NetU1_4: U1.4 U10.17
NetU1_5: U1.5 U10.16
NetU1_6: U1.6 U10.15
NetU1_7: U1.7 U10.14
NetU10_9: U10.9 U10.24 U10.36 U10.48
Power3v3: C19.Positivo C21.2 C24.2 C25.2 C26.2 C27.2 CN1.1 CN1.2 L2.1 R1.1 R4.1 R5.1 R6.1 R7.1 R9.2 R18.2 R27.2 R47.2 R54.2 R66.2 R67.2 U5.2
Power5v0: C15.2 C17.Positivo C20.2 C22.Positivo L1.2 R16.2 R36.2 R38.2 R39.2 U5.0
Power-uC: C1.2 C3.2 C4.2 C8.2 C9.2 C10.2 C11.2 C12.2 C13.2 C23.2 C28.2 C29.Positivo C30.Positivo L2.2 R3.2 SW1.2 U9.2
Pwr-uC-Gnd: C1.1 C3.1 C4.1 C5.2 C7.2 C8.1 C9.1 C10.1 C11.1 C12.1 C13.1 C23.1 C28.1 C29.Negativo C30.Negativo L3.2 R17.2 R65.2 U9.3 U10.8 U10.23 U10.35 U10.47
TensaoEntrada: BZ1.POS C2.2 P1.1 P2.1 P4.2 P5.1 P6.1 P7.1 P9.2 P10.2 R21.2 R32.2 R44.2 R60.2 U1.9 U8.1
pads on no net: CN1.17 IC2.3 IC2.5 IC3.3 IC3.5 IC4.3 IC4.5 IC5.3 IC5.5 J3.2 J4.2 J5.2 R53.2 U8.3 U10.1 U10.2 U10.3 U10.4 U10.29 U10.32 U10.33 U10.41 U10.42 U10.43 U10.45

## Keep-outs
Keep-Out Layer:
  the board outline again, w10

## Text inside footprints (layer, text, board x,y; h text height)
DS1: Top Overlay "A" at -4302,-1183 h20; Top Overlay "K" at -4302,-1108 h22
DS2: Top Overlay "A" at -4578,-1226 h20; Top Overlay "K" at -4578,-1151 h22